# EAGLE board CT_schematic (EAGLE 7.6.0)

Size 100 x 80 mm. Coordinates in mm from the lower left corner, seen from the top.
Outline: 0,0 100,0 100,80 0,80 0,0
Copper layers (1*16): Top 0.035mm / dielectric 1.5mm / Bottom 0.035mm
Design rules "default": minimum track width 10mil, minimum drill 24mil, track to track 8mil, track to pad 8mil, pad to pad 8mil, via to via 8mil, smd to smd 8mil, copper to edge 40mil, drill to drill 8mil, minimum pad ring 10mil, minimum via ring 8mil, stop-mask expansion 4mil, vias tented up to drill 0mil, thermal gap 10mil

## Footprints (pad centres in the part's own frame; a part is rotated, then mirrored left to right if it is on the bottom)
C0603 = smd 0.8 x 0.8: 1 -0.762,0; 2 0.762,0
C0402 = smd 0.5 x 0.5: 1 -0.508,0; 2 0.508,0
C0805 = smd 1.2 x 1.3: 1 -1.016,0; 2 1.016,0
C1206 = smd 1.3 x 1.6: 1 -1.524,0; 2 1.524,0
C1210 = smd 1.2 x 2.5: 1 -1.524,0; 2 1.524,0
EXV-9H = smd 3.505 x 1.676: 1 -2.857,0; 2 2.857,0
L0603 = smd 0.8 x 0.8: 1 -0.762,0; 2 0.762,0
L1210 = smd 1.2 x 2.5: 1 -1.524,0; 2 1.524,0
PJ-037B_PACKAGE = drill 3.7 square: 1 12,0 | drill 3.2 square: 2 6,0
R0603 = smd 0.8 x 0.8: 1 -0.762,0; 2 0.762,0
LQFP100 = smd 0.3 x 1.2: 1 -6,-7.75; 2 -5.5,-7.75; 3 -5,-7.75; 4 -4.5,-7.75; 5 -4,-7.75; 6 -3.5,-7.75; 7 -3,-7.75; 8 -2.5,-7.75; 9 -2,-7.75; 10 -1.5,-7.75; 11 -1,-7.75; 12 -0.5,-7.75; 13 0,-7.75; 14 0.5,-7.75; 15 1,-7.75; 16 1.5,-7.75; 17 2,-7.75; 18 2.5,-7.75; 19 3,-7.75; 20 3.5,-7.75; 21 4,-7.75; 22 4.5,-7.75; 23 5,-7.75; 24 5.5,-7.75; 25 6,-7.75; 51 6,7.75; 52 5.5,7.75; 53 5,7.75; 54 4.5,7.75; 55 4,7.75; 56 3.5,7.75; 57 3,7.75; 58 2.5,7.75; 59 2,7.75; 60 1.5,7.75; 61 1,7.75; 62 0.5,7.75; 63 0,7.75; 64 -0.5,7.75; 65 -1,7.75; 66 -1.5,7.75; 67 -2,7.75; 68 -2.5,7.75; 69 -3,7.75; 70 -3.5,7.75; 71 -4,7.75; 72 -4.5,7.75; 73 -5,7.75; 74 -5.5,7.75; 75 -6,7.75 | smd 1.2 x 0.3: 26 7.75,-6; 27 7.75,-5.5; 28 7.75,-5; 29 7.75,-4.5; 30 7.75,-4; 31 7.75,-3.5; 32 7.75,-3; 33 7.75,-2.5; 34 7.75,-2; 35 7.75,-1.5; 36 7.75,-1; 37 7.75,-0.5; 38 7.75,0; 39 7.75,0.5; 40 7.75,1; 41 7.75,1.5; 42 7.75,2; 43 7.75,2.5; 44 7.75,3; 45 7.75,3.5; 46 7.75,4; 47 7.75,4.5; 48 7.75,5; 49 7.75,5.5; 50 7.75,6; 76 -7.75,6; 77 -7.75,5.5; 78 -7.75,5; 79 -7.75,4.5; 80 -7.75,4; 81 -7.75,3.5; 82 -7.75,3; 83 -7.75,2.5; 84 -7.75,2; 85 -7.75,1.5; 86 -7.75,1; 87 -7.75,0.5; 88 -7.75,0; 89 -7.75,-0.5; 90 -7.75,-1; 91 -7.75,-1.5; 92 -7.75,-2; 93 -7.75,-2.5; 94 -7.75,-3; 95 -7.75,-3.5; 96 -7.75,-4; 97 -7.75,-4.5; 98 -7.75,-5; 99 -7.75,-5.5; 100 -7.75,-6
HTQFP-64-EXP = smd 1.5 x 0.3: 1 -5.7,3.75; 2 -5.7,3.25; 3 -5.7,2.75; 4 -5.7,2.25; 5 -5.7,1.75; 6 -5.7,1.25; 7 -5.7,0.75; 8 -5.7,0.25; 9 -5.7,-0.25; 10 -5.7,-0.75; 11 -5.7,-1.25; 12 -5.7,-1.75; 13 -5.7,-2.25; 14 -5.7,-2.75; 15 -5.7,-3.25; 16 -5.7,-3.75; 33 5.7,-3.75; 34 5.7,-3.25; 35 5.7,-2.75; 36 5.7,-2.25; 37 5.7,-1.75; 38 5.7,-1.25; 39 5.7,-0.75; 40 5.7,-0.25; 41 5.7,0.25; 42 5.7,0.75; 43 5.7,1.25; 44 5.7,1.75; 45 5.7,2.25; 46 5.7,2.75; 47 5.7,3.25; 48 5.7,3.75 | smd 0.3 x 1.5: 17 -3.75,-5.7; 18 -3.25,-5.7; 19 -2.75,-5.7; 20 -2.25,-5.7; 21 -1.75,-5.7; 22 -1.25,-5.7; 23 -0.75,-5.7; 24 -0.25,-5.7; 25 0.25,-5.7; 26 0.75,-5.7; 27 1.25,-5.7; 28 1.75,-5.7; 29 2.25,-5.7; 30 2.75,-5.7; 31 3.25,-5.7; 32 3.75,-5.7; 49 3.75,5.7; 50 3.25,5.7; 51 2.75,5.7; 52 2.25,5.7; 53 1.75,5.7; 54 1.25,5.7; 55 0.75,5.7; 56 0.25,5.7; 57 -0.25,5.7; 58 -0.75,5.7; 59 -1.25,5.7; 60 -1.75,5.7; 61 -2.25,5.7; 62 -2.75,5.7; 63 -3.25,5.7; 64 -3.75,5.7 | smd 8 x 8: EXP 0,0 | drill 0.2 pad 0.3: P$9 3.25,3.25; P$10 1.95,3.25; P$11 0.65,3.25; P$12 -0.65,3.25; P$13 -1.95,3.25; P$14 -3.25,3.25; P$15 -3.25,1.95; P$16 -1.95,1.95; P$17 -0.65,1.95; P$18 0.65,1.95; P$19 1.95,1.95; P$20 3.25,1.95; P$24 3.25,0.65; P$25 3.25,-0.65; P$26 1.95,0.65; P$27 1.95,-0.65; P$28 0.65,0.65; P$29 0.65,-0.65; P$30 -0.65,0.65; P$31 -0.65,-0.65; P$32 -1.95,0.65; P$33 -1.95,-0.65; P$34 -3.25,0.65; P$35 -3.25,-0.65; P$36 -3.25,-1.95; P$37 -1.95,-1.95; P$38 -0.65,-1.95; P$39 0.65,-1.95; P$40 1.95,-1.95; P$41 3.25,-1.95; P$44 3.25,-3.25; P$45 1.95,-3.25; P$46 0.65,-3.25; P$47 -0.65,-3.25; P$48 -1.95,-3.25; P$49 -3.25,-3.25
7499511611A = drill 0.9: 1 -5.075,-15.24; 2 -3.045,-15.24; 3 -1.015,-15.24; 4 1.015,-15.24; 5 3.045,-15.24; 6 5.075,-15.24; 7 -6.09,-17.78; 8 -4.06,-17.78; 9 -2.03,-17.78; 10 2.03,-17.78; 11 4.06,-17.78; 12 6.09,-17.78; 13 -5.59,-8.12; 14 5.59,-8.12; 15 -5.59,-6.66; 16 5.59,-6.66 | drill 1.02: 17 -6.095,-20.32; 18 -3.555,-20.32; 19 3.555,-20.32; 20 6.095,-20.32 | drill 1.57: Z1 -8.065,3.18; Z2 8.065,3.18 | hole 3: -6.35,0; 6.35,0
SAMTEC_FTSH-105-01-L-DV-K = smd 0.762 x 2.794: 1 -2.54,-2.032; 2 -2.54,2.032; 3 -1.27,-2.032; 4 -1.27,2.032; 5 0,-2.032; 6 0,2.032; 7 1.27,-2.032; 8 1.27,2.032; 9 2.54,-2.032; 10 2.54,2.032
SSOP-20 = smd 1.651 x 0.432: 1 -3.48,2.925; 2 -3.48,2.275; 3 -3.48,1.625; 4 -3.48,0.975; 5 -3.48,0.325; 6 -3.48,-0.325; 7 -3.48,-0.975; 8 -3.48,-1.625; 9 -3.48,-2.275; 10 -3.48,-2.925; 11 3.48,-2.925; 12 3.48,-2.275; 13 3.48,-1.625; 14 3.48,-0.975; 15 3.48,-0.325; 16 3.48,0.325; 17 3.48,0.975; 18 3.48,1.625; 19 3.48,2.275; 20 3.48,2.925
HTSS-105-01-G-D = drill 1 pad 1.8 square: 1 0,0 | drill 1 pad 1.8: 2 0,2.54; 3 2.54,0; 4 2.54,2.54; 5 5.08,0; 6 5.08,2.54; 7 7.62,0; 8 7.62,2.54; 9 10.16,0; 10 10.16,2.54
MOLEX_47219-2001 = smd 0.8 x 1.5: 1 3.2,-2.1; 2 2.1,-2.1; 3 1,-2.1; 4 -0.1,-2.1; 5 -1.2,-2.1; 6 -2.3,-2.1; 7 -3.4,-2.1; 8 -4.5,-2.1 | smd 1.5 x 2.05: G1 6.875,-4.7; G2 6.875,3.6; G3 -6.875,3.6; G4 -6.875,-4.7
ABS07-32.768KHZ-7-T = smd 1.1 x 2.4: 1 -2.5,0; 2 0,0
ASFL1 = smd 1.7 x 1.5: 1 -1.27,-1.1; 2 1.27,-1.1; 3 1.27,1.1; 4 -1.27,1.1
IDT74FCT38072 = smd 0.51 x 1: 1 0,0; 2 1.27,0; 3 2.54,0; 4 3.81,0; 5 3.81,4.95; 6 2.54,4.95; 7 1.27,4.95; 8 0,4.95
WSON-8 = smd 0.3 x 0.6: 1 -0.75,0; 2 0.05,0; 3 0.85,0; 4 1.65,0; 5 1.65,3.8; 6 0.85,3.8; 7 0.05,3.8; 8 -0.75,3.8 | smd 3 x 2.6: PAD 0.45,1.9
SOIC-8_EP = smd 1.6 x 0.533: 1 -2.921,1.905; 2 -2.921,0.635; 3 -2.921,-0.635; 4 -2.921,-1.905; 5 2.921,-1.905; 6 2.921,-0.635; 7 2.921,0.635; 8 2.921,1.905 | smd 2.54 x 3.302: EPAD 0,0 | drill 0.406 pad 0.406: P$1 -0.508,0.635; P$2 0.381,0.635; P$3 -0.508,-0.635; P$4 0.381,-0.635
SON-6 = smd 0.55 x 0.3: 1 -0.355,0.5 | smd 0.52 x 0.3: 2 -0.37,0; 3 -0.37,-0.5; 4 0.37,-0.5; 5 0.37,0; 6 0.37,0.5
SW_4-1437565-2 = smd 1.4 x 2.1: 1 -2.23,4.55; 2 -2.23,-4.55; 3 2.23,4.55; 4 2.23,-4.55
LGM67K-G1J2-24-Z = smd 0.8 x 1.4: A -2,0; C 0,0
NC7SZ125M5X = smd 1.3 x 0.7: 1 -1.3,0.95; 2 -1.3,0; 3 -1.3,-0.95; 4 1.3,-0.95; 5 1.3,0.95

## Placement (x,y rotation side)
C1  1e-06  [C0603]  -86.36,92.71 0 top  (outside the outline)
C2  1e-07  [C0603]  -90.17,92.71 0 top  (outside the outline)
C3  1e-07  [C0603]  -93.98,92.71 0 top  (outside the outline)
C4  1e-07  [C0603]  -15.24,97.79 0 top  (outside the outline)
C5  1e-07  [C0603]  -19.05,97.79 0 top  (outside the outline)
C6  1e-07  [C0603]  -22.86,97.79 0 top  (outside the outline)
C7  1e-07  [C0603]  -26.67,97.79 0 top  (outside the outline)
C8  4.7e-06  [C0603]  -74.93,92.71 0 top  (outside the outline)
C9  2.2e-06  [C0603]  -78.74,92.71 0 top  (outside the outline)
C10  2.2e-06  [C0603]  -82.55,92.71 0 top  (outside the outline)
C11  1e-08  [C0603]  -30.48,97.79 0 top  (outside the outline)
C12  1e-06  [C0603]  -34.29,97.79 0 top  (outside the outline)
C13  1e-11  [C0402]  -76.2,102.87 0 top  (outside the outline)
C14  1e-11  [C0402]  -80.01,102.87 0 top  (outside the outline)
C15  1e-07  [C0402]  -83.82,102.87 0 top  (outside the outline)
C16  1e-06  [C0603]  -38.1,97.79 0 top  (outside the outline)
C17  1e-07  [C0402]  -87.63,102.87 0 top  (outside the outline)
C18  1e-06  [C0603]  -41.91,97.79 0 top  (outside the outline)
C19  1e-07  [C0402]  -91.44,102.87 0 top  (outside the outline)
C20  1e-06  [C0603]  -45.72,97.79 0 top  (outside the outline)
C21  1e-07  [C0402]  -15.24,107.95 0 top  (outside the outline)
C22  1e-05  [C0805]  -34.29,81.28 0 top  (outside the outline)
C23  1e-08  [C0402]  -19.05,107.95 0 top  (outside the outline)
C24  1e-06  [C0603]  -49.53,97.79 0 top  (outside the outline)
C25  1e-07  [C0402]  -22.86,107.95 0 top  (outside the outline)
C26  1e-06  [C0603]  -53.34,97.79 0 top  (outside the outline)
C27  1e-07  [C0402]  -26.67,107.95 0 top  (outside the outline)
C28  1e-05  [C0805]  -39.37,81.28 0 top  (outside the outline)
C29  1e-08  [C0402]  -30.48,107.95 0 top  (outside the outline)
C30  1e-06  [C0603]  -57.15,97.79 0 top  (outside the outline)
C31  1e-07  [C0402]  -34.29,107.95 0 top  (outside the outline)
C32  1e-06  [C0603]  -60.96,97.79 0 top  (outside the outline)
C33  1e-07  [C0402]  -38.1,107.95 0 top  (outside the outline)
C34  1e-06  [C0603]  -64.77,97.79 0 top  (outside the outline)
C35  1e-07  [C0402]  -41.91,107.95 0 top  (outside the outline)
C36  1e-06  [C0603]  -68.58,97.79 0 top  (outside the outline)
C37  1e-07  [C0402]  -45.72,107.95 0 top  (outside the outline)
C38  1e-05  [C0805]  -44.45,81.28 0 top  (outside the outline)
C39  1e-08  [C0402]  -49.53,107.95 0 top  (outside the outline)
C40  1e-06  [C0603]  -72.39,97.79 0 top  (outside the outline)
C41  1e-07  [C0402]  -53.34,107.95 0 top  (outside the outline)
C42  1e-06  [C0603]  -76.2,97.79 0 top  (outside the outline)
C43  1e-07  [C0402]  -57.15,107.95 0 top  (outside the outline)
C44  1e-05  [C0805]  -49.53,81.28 0 top  (outside the outline)
C45  1e-08  [C0402]  -60.96,107.95 0 top  (outside the outline)
C46  1e-07  [C0402]  -64.77,107.95 0 top  (outside the outline)
C47  1e-06  [C0603]  -80.01,97.79 0 top  (outside the outline)
C48  1e-06  [C0603]  -83.82,97.79 0 top  (outside the outline)
C49  1e-06  [C0603]  -87.63,97.79 0 top  (outside the outline)
C50  4.7e-06  [C0805]  -54.61,81.28 0 top  (outside the outline)
C51  1e-07  [C0402]  -68.58,107.95 0 top  (outside the outline)
C52  1e-05  [C0805]  -59.69,81.28 0 top  (outside the outline)
C53  1e-08  [C0402]  -72.39,107.95 0 top  (outside the outline)
C54  1e-08  [C0402]  -76.2,107.95 0 top  (outside the outline)
C55  1e-08  [C0402]  -80.01,107.95 0 top  (outside the outline)
C56  1e-05  [C1206]  -76.2,74.93 0 top  (outside the outline)
C57  1e-05  [C0805]  -64.77,81.28 0 top  (outside the outline)
C58  1e-08  [C0402]  -83.82,107.95 0 top  (outside the outline)
C59  1e-05  [C1206]  -82.55,74.93 0 top  (outside the outline)
C60  1e-05  [C0805]  -69.85,81.28 0 top  (outside the outline)
C61  1e-08  [C0402]  -87.63,107.95 0 top  (outside the outline)
C62  1e-05  [C1206]  -88.9,74.93 0 top  (outside the outline)
C63  1e-05  [C1210]  -38.1,74.93 0 top  (outside the outline)
C64  1e-05  [C1210]  -44.45,74.93 0 top  (outside the outline)
C65  1e-05  [C1210]  -50.8,74.93 0 top  (outside the outline)
C66  1e-05  [C1210]  -57.15,74.93 0 top  (outside the outline)
C67  1e-05  [C1210]  -63.5,74.93 0 top  (outside the outline)
C68  1e-07  [C0402]  -91.44,107.95 0 top  (outside the outline)
C69  0.0001  [EXV-9H]  -53.34,66.04 0 top  (outside the outline)
C70  0.0001  [EXV-9H]  -64.77,66.04 0 top  (outside the outline)
C71  1e-08  [C0402]  -15.24,113.03 0 top  (outside the outline)
C72  1e-08  [C0402]  -19.05,113.03 0 top  (outside the outline)
C73  1e-08  [C0402]  -22.86,113.03 0 top  (outside the outline)
F1  240.0  [L0603]  -91.44,97.79 0 top  (outside the outline)
I1  1.5e-05  [L1210]  -69.85,74.93 0 top  (outside the outline)
J1  PJ-037B  [PJ-037B_PACKAGE]  -57.15,45.72 0 top  (outside the outline)
R2  1000.0  [R0603]  -15.24,102.87 0 top  (outside the outline)
R4  4700.0  [R0603]  -19.05,102.87 0 top  (outside the outline)
R5  4700.0  [R0603]  -22.86,102.87 0 top  (outside the outline)
R6  2200.0  [R0603]  -26.67,102.87 0 top  (outside the outline)
R7  2200.0  [R0603]  -30.48,102.87 0 top  (outside the outline)
R8  10000.0  [R0603]  -71.12,87.63 0 top  (outside the outline)
R9  200.0  [R0603]  -34.29,102.87 0 top  (outside the outline)
R10  200.0  [R0603]  -38.1,102.87 0 top  (outside the outline)
R11  10000.0  [R0603]  -76.2,87.63 0 top  (outside the outline)
R12  11000.0  [R0603]  -81.28,87.63 0 top  (outside the outline)
R13  10000.0  [R0603]  -86.36,87.63 0 top  (outside the outline)
R14  10000.0  [R0603]  -91.44,87.63 0 top  (outside the outline)
R15  10000.0  [R0603]  -15.24,92.71 0 top  (outside the outline)
R16  10000.0  [R0603]  -20.32,92.71 0 top  (outside the outline)
R17  10000.0  [R0603]  -25.4,92.71 0 top  (outside the outline)
R18  10000.0  [R0603]  -30.48,92.71 0 top  (outside the outline)
R19  10000.0  [R0603]  -35.56,92.71 0 top  (outside the outline)
R20  2490.0  [R0603]  -41.91,102.87 0 top  (outside the outline)
R21  10000.0  [R0603]  -40.64,92.71 0 top  (outside the outline)
R22  10000.0  [R0603]  -45.72,92.71 0 top  (outside the outline)
R23  10000.0  [R0603]  -50.8,92.71 0 top  (outside the outline)
R24  10000.0  [R0603]  -55.88,92.71 0 top  (outside the outline)
R25  5.0  [R0603]  -45.72,102.87 0 top  (outside the outline)
R26  100000.0  [R0603]  -83.82,81.28 0 top  (outside the outline)
R27  100000.0  [R0603]  -88.9,81.28 0 top  (outside the outline)
R28  100000.0  [R0603]  -93.98,81.28 0 top  (outside the outline)
R29  100000.0  [R0603]  -15.24,87.63 0 top  (outside the outline)
R30  100000.0  [R0603]  -20.32,87.63 0 top  (outside the outline)
R31  100000.0  [R0603]  -25.4,87.63 0 top  (outside the outline)
R32  100000.0  [R0603]  -30.48,87.63 0 top  (outside the outline)
R33  100000.0  [R0603]  -35.56,87.63 0 top  (outside the outline)
R34  100000.0  [R0603]  -40.64,87.63 0 top  (outside the outline)
R35  100000.0  [R0603]  -45.72,87.63 0 top  (outside the outline)
R36  100.0  [R0603]  -49.53,102.87 0 top  (outside the outline)
R37  1000.0  [R0603]  -53.34,102.87 0 top  (outside the outline)
R38  100000.0  [R0603]  -50.8,87.63 0 top  (outside the outline)
R39  806.0  [R0603]  -57.15,102.87 0 top  (outside the outline)
R40  1000.0  [R0603]  -60.96,102.87 0 top  (outside the outline)
R41  100000.0  [R0603]  -55.88,87.63 0 top  (outside the outline)
R42  1500.0  [R0603]  -64.77,102.87 0 top  (outside the outline)
R43  1000.0  [R0603]  -68.58,102.87 0 top  (outside the outline)
R44  4031.5447154472  [R0603]  -78.74,81.28 0 top  (outside the outline)
R45  2200.0  [R0603]  -72.39,102.87 0 top  (outside the outline)
R46  10000.0  [R0603]  -60.96,92.71 0 top  (outside the outline)
R47  10000.0  [R0603]  -66.04,92.71 0 top  (outside the outline)
R48  82000.0  [R0603]  -71.12,92.71 0 top  (outside the outline)
R49  300000.0  [R0603]  -60.96,87.63 0 top  (outside the outline)
R50  120000.0  [R0603]  -66.04,87.63 0 top  (outside the outline)
U1  STM32F207VET6  [LQFP100]  -43.18,8.89 0 top  (outside the outline)
U2  DP83867IRPAPT  [HTQFP-64-EXP]  -60.96,8.89 0 top  (outside the outline)
U3  7499511611A  [7499511611A]  -22.86,25.4 0 top  (outside the outline)
U4  FTSH-105-01-L-DV-K  [SAMTEC_FTSH-105-01-L-DV-K]  -35.56,45.72 0 top  (outside the outline)
U5  MAX3218EAP+T  [SSOP-20]  -17.78,57.15 0 top  (outside the outline)
U6  HTSS-105-01-G-D  [HTSS-105-01-G-D]  -92.71,41.91 0 top  (outside the outline)
U7  0472192001  [MOLEX_47219-2001]  -77.47,8.89 0 top  (outside the outline)
U8  ABS07-32.768KHZ-7-T  [ABS07-32.768KHZ-7-T]  -86.36,66.04 0 top  (outside the outline)
U9  ASFL1-25MHZ-NCS  [ASFL1]  -26.67,67.31 0 top  (outside the outline)
U10  idt74fct38072  [IDT74FCT38072]  -46.99,63.5 0 top  (outside the outline)
U11  LP3878SDX-ADJ/NOPB  [WSON-8]  -40.64,55.88 0 top  (outside the outline)
U12  LP3878SDX-ADJ/NOPB  [WSON-8]  -60.96,55.88 0 top  (outside the outline)
U13  LP3878SDX-ADJ/NOPB  [WSON-8]  -81.28,55.88 0 top  (outside the outline)
U14  MIC5234YME  [SOIC-8_EP]  -17.78,74.93 0 top  (outside the outline)
U15  TPS3895ADRYR  [SON-6]  -25.4,111.76 0 top  (outside the outline)
U16  4-1437565-2  [SW_4-1437565-2]  -73.66,44.45 0 top  (outside the outline)
U17  Q65110A2395  [LGM67K-G1J2-24-Z]  -26.67,74.93 0 top  (outside the outline)
U18  nc7sz125m5x  [NC7SZ125M5X]  -15.24,81.28 0 top  (outside the outline)
U19  nc7sz125m5x  [NC7SZ125M5X]  -21.59,81.28 0 top  (outside the outline)
U20  nc7sz125m5x  [NC7SZ125M5X]  -27.94,81.28 0 top  (outside the outline)

## Library data of the parts
C1-C73 F1 I1 J1 R2 R4-R50 U1-U20 = circuit_tree

## Nets
CLK_CRYSTAL_U1_8: C13.1 U1.8 U8.1
CLK_CRYSTAL_U1_9: C14.1 U1.9 U8.2
CLK_U1_12: U1.12 U10.7
CLK_U2_19: U2.19 U10.6
CLK_U10_3: U9.3 U10.3
GND: C1.2 C2.2 C3.2 C4.2 C5.2 C6.2 C7.2 C8.2 C9.2 C10.2 C11.2 C12.2 C13.2 C14.2 C15.2 C16.2 C17.2 C18.2 C19.2 C20.2 C21.2 C22.2 C23.2 C24.2 C25.2 C26.2 C27.2 C28.2 C29.2 C30.2 C31.2 C32.2 C33.2 C34.2 C35.2 C36.2 C37.2 C38.2 C39.2 C40.2 C41.2 C42.2 C43.2 C44.2 C45.2 C46.2 C47.2 C48.2 C49.2 C51.2 C52.2 C53.2 C54.2 C55.2 C56.2 C57.2 C58.2 C59.2 C60.2 C61.2 C62.2 C63.2 C64.2 C65.2 C66.2 C67.2 C68.2 C69.2 C70.2 C71.2 C72.2 C73.2 J1.2 R2.2 R8.2 R12.2 R13.2 R14.2 R15.2 R16.2 R17.2 R18.2 R19.2 R24.2 R25.2 R37.2 R40.2 R43.2 R45.2 R48.2 R50.2 U1.10 U1.20 U1.27 U1.74 U2.EXP U3.17 U3.20 U3.Z1 U3.Z2 U4.3 U4.5 U5.5 U5.17 U5.20 U6.9 U7.6 U7.G1 U7.G2 U7.G3 U7.G4 U9.2 U10.4 U10.5 U10.8 U11.3 U11.PAD U12.3 U12.PAD U13.3 U13.PAD U14.7 U14.EPAD U15.2 U17.C U18.2 U18.3 U19.1 U19.3 U20.1 U20.3
NET_U1_14: R5.1 U1.14 U20.4
NET_U1_16: R6.1 U1.16 U2.20
NET_U1_22: C11.1 C12.1 F1.1 U1.21 U1.22
NET_U1_25: R7.1 U1.25 U2.21
NET_U1_49: C9.1 U1.49
NET_U1_73: C10.1 U1.73
NET_U1_94: R8.1 U1.94
NET_U1_97: U17.A
NET_U1_98: U16.3 U16.4
NET_U2_15: R12.1 U2.15
NET_U2_24: R18.1 U2.24
NET_U2_25: R19.1 U2.25
NET_U2_31: R14.1 U2.31
NET_U2_32: R15.1 U2.32
NET_U2_33: R16.1 U2.33
NET_U2_34: R17.1 U2.34
NET_U2_40: R13.1 U2.40
NET_U2_59: R4.1 U2.59 U19.4
NET_U2_60: R11.1 U2.60
NET_U3_1: U3.1
NET_U3_2: U2.11 U3.2
NET_U3_3: U2.10 U3.3
NET_U3_4: U2.5 U3.4
NET_U3_5: U2.6 U3.5
NET_U3_6: C15.1 U3.1 U3.6 U3.7 U3.12
NET_U3_7: U3.7
NET_U3_8: U2.13 U3.8
NET_U3_9: U2.14 U3.9
NET_U3_10: U2.3 U3.10
NET_U3_11: U2.2 U3.11
NET_U3_18: R9.1 U3.18
NET_U3_19: R10.1 U3.19
NET_U3_61: R10.2
NET_U3_63: R9.2
NET_U4_9: R25.1 U4.9
NET_U5_1: I1.1 U5.1
NET_U5_2: R26.1 U5.2
NET_U5_3: R27.1 U5.3
NET_U5_4: R28.1 U5.4
NET_U5_15: C49.1 U5.15
NET_U5_16: C50.2 U5.16
NET_U5_18: C50.1 U5.18
NET_U5_19: C48.1 U5.19
NET_U6_3: U5.12 U6.3
NET_U6_4: U5.11 U6.4
NET_U6_5: U5.14 U6.5
NET_U6_6: U5.13 U6.6
NET_U11_1: C55.1 U11.1
NET_U11_6: R36.2 R37.1 U11.6
NET_U11_8: R35.1 U11.8
NET_U12_1: C58.1 U12.1
NET_U12_6: R39.2 R40.1 U12.6
NET_U12_8: R38.1 U12.8
NET_U13_1: C61.1 U13.1
NET_U13_6: R42.2 R43.1 U13.6
NET_U13_8: R41.1 U13.8
NET_U14_4: R44.2 R45.1 U14.4
NET_U15_1: R47.1 R48.1 U15.1
NET_U15_3: R49.2 R50.1 U15.3
NET_U15_4: R46.1 U15.4 U18.4 U19.2 U20.2
NET_U16_1: R2.1 U16.1 U16.2
PROC_ETH_COL: U1.26 U2.55
PROC_ETH_CRS: U1.23 U2.56
PROC_ETH_RX_CLK: U1.24 U2.43
PROC_ETH_RX_DV: U1.32 U2.53
PROC_ETH_RX_ER: U1.47 U2.54
PROC_ETH_RXD0: R20.1 U1.33 U2.44
PROC_ETH_RXD1: U1.34 U2.45
PROC_ETH_RXD2: U1.35 U2.46
PROC_ETH_RXD3: U1.36 U2.47
PROC_ETH_TX_CLK: U1.18 U2.30
PROC_ETH_TX_EN: U1.48 U2.52
PROC_ETH_TXD0: U1.51 U2.38
PROC_ETH_TXD1: U1.52 U2.37
PROC_ETH_TXD2: U1.17 U2.36
PROC_ETH_TXD3: U1.1 U2.35
PROC_SDIO_CK: R30.1 U1.80 U7.5
PROC_SDIO_CMD: R29.1 U1.83 U7.3
PROC_SDIO_D0: R31.1 U1.65 U7.7
PROC_SDIO_D1: R32.1 U1.66 U7.8
PROC_SDIO_D2: R33.1 U1.78 U7.1
PROC_SDIO_D3: R34.1 U1.79 U7.2
PROC_SYS_JTDI: R22.1 U1.77 U4.8
PROC_SYS_JTDO_SWO: U1.89 U4.6
PROC_SYS_JTMS_SWDIO: R23.1 U1.72 U4.2
PROC_SYS_TRACECLK: R24.1 U1.76 U4.4
PROC_USART1_CTS: U1.70 U5.8
PROC_USART1_RTS: U1.71 U5.10
PROC_USART1_RX: U1.69 U5.9
PROC_USART1_TX: U1.68 U5.7
RST_OUT_U4_JTAG_RST_B: R21.1 U4.10 U18.1
VCC_S1_8V6: C56.1 C59.1 C62.1 C64.1 C65.1 C69.1 C70.1 J1.1 R35.2 R38.2 R41.2 U11.4 U12.4 U13.4 U14.5 U14.8
VCC_TIER1_1V1: C30.1 C31.1 C32.1 C33.1 C34.1 C35.1 C36.1 C37.1 C38.1 C39.1 C57.1 R36.1 U2.8 U2.29 U2.42 U2.58 U11.5
VCC_TIER1_1V8: C1.1 C2.1 C3.1 C4.1 C5.1 C6.1 C7.1 C8.1 C16.1 C17.1 C18.1 C19.1 C20.1 C21.1 C22.1 C23.1 C40.1 C41.1 C42.1 C43.1 C44.1 C45.1 C46.1 C47.1 C51.1 C52.1 C60.1 C68.1 C71.1 C72.1 C73.1 F1.2 I1.2 R4.2 R5.2 R6.2 R7.2 R11.2 R20.2 R21.2 R22.2 R23.2 R26.2 R27.2 R28.2 R29.2 R30.2 R31.2 R32.2 R33.2 R34.2 R39.1 R46.2 R47.2 R49.1 U1.6 U1.11 U1.19 U1.28 U1.50 U1.75 U1.100 U2.17 U2.23 U2.41 U2.57 U2.64 U4.1 U5.6 U7.4 U12.5 U15.6 U18.5 U19.5 U20.5
VCC_TIER1_2V5: C24.1 C25.1 C26.1 C27.1 C28.1 C29.1 C63.1 R42.1 U2.4 U2.12 U13.5
VCC_TIER1_3V3: C53.1 C54.1 C66.1 C67.1 R44.1 U9.4 U10.1 U10.2 U14.1

## Tracks (layer width: path | path; a pad name or v marks a point on that pad's centre or on a via)
CLK_CRYSTAL_U1_8  (2 unrouted)
CLK_CRYSTAL_U1_9  (2 unrouted)
CLK_U1_12  (1 unrouted)
CLK_U2_19  (1 unrouted)
CLK_U10_3  (1 unrouted)
GND  (130 unrouted)
NET_U1_14  (2 unrouted)
NET_U1_16  (2 unrouted)
NET_U1_22  (4 unrouted)
NET_U1_25  (2 unrouted)
NET_U1_49  (1 unrouted)
NET_U1_73  (1 unrouted)
NET_U1_94  (1 unrouted)
NET_U1_98  (1 unrouted)
NET_U2_15  (1 unrouted)
NET_U2_24  (1 unrouted)
NET_U2_25  (1 unrouted)
NET_U2_31  (1 unrouted)
NET_U2_32  (1 unrouted)
NET_U2_33  (1 unrouted)
NET_U2_34  (1 unrouted)
NET_U2_40  (1 unrouted)
NET_U2_59  (2 unrouted)
NET_U2_60  (1 unrouted)
NET_U3_2  (1 unrouted)
NET_U3_3  (1 unrouted)
NET_U3_4  (1 unrouted)
NET_U3_5  (1 unrouted)
NET_U3_6  (4 unrouted)
NET_U3_8  (1 unrouted)
NET_U3_9  (1 unrouted)
NET_U3_10  (1 unrouted)
NET_U3_11  (1 unrouted)
NET_U3_18  (1 unrouted)
NET_U3_19  (1 unrouted)
NET_U4_9  (1 unrouted)
NET_U5_1  (1 unrouted)
NET_U5_2  (1 unrouted)
NET_U5_3  (1 unrouted)
NET_U5_4  (1 unrouted)
NET_U5_15  (1 unrouted)
NET_U5_16  (1 unrouted)
NET_U5_18  (1 unrouted)
NET_U5_19  (1 unrouted)
NET_U6_3  (1 unrouted)
NET_U6_4  (1 unrouted)
NET_U6_5  (1 unrouted)
NET_U6_6  (1 unrouted)
NET_U11_1  (1 unrouted)
NET_U11_6  (2 unrouted)
NET_U11_8  (1 unrouted)
NET_U12_1  (1 unrouted)
NET_U12_6  (2 unrouted)
NET_U12_8  (1 unrouted)
NET_U13_1  (1 unrouted)
NET_U13_6  (2 unrouted)
NET_U13_8  (1 unrouted)
NET_U14_4  (2 unrouted)
NET_U15_1  (2 unrouted)
NET_U15_3  (2 unrouted)
NET_U15_4  (4 unrouted)
NET_U16_1  (2 unrouted)
PROC_ETH_COL  (1 unrouted)
PROC_ETH_CRS  (1 unrouted)
PROC_ETH_RX_CLK  (1 unrouted)
PROC_ETH_RX_DV  (1 unrouted)
PROC_ETH_RX_ER  (1 unrouted)
PROC_ETH_RXD0  (2 unrouted)
PROC_ETH_RXD1  (1 unrouted)
PROC_ETH_RXD2  (1 unrouted)
PROC_ETH_RXD3  (1 unrouted)
PROC_ETH_TX_CLK  (1 unrouted)
PROC_ETH_TX_EN  (1 unrouted)
PROC_ETH_TXD0  (1 unrouted)
PROC_ETH_TXD1  (1 unrouted)
PROC_ETH_TXD2  (1 unrouted)
PROC_ETH_TXD3  (1 unrouted)
PROC_SDIO_CK  (2 unrouted)
PROC_SDIO_CMD  (2 unrouted)
PROC_SDIO_D0  (2 unrouted)
PROC_SDIO_D1  (2 unrouted)
PROC_SDIO_D2  (2 unrouted)
PROC_SDIO_D3  (2 unrouted)
PROC_SYS_JTDI  (2 unrouted)
PROC_SYS_JTDO_SWO  (1 unrouted)
PROC_SYS_JTMS_SWDIO  (2 unrouted)
PROC_SYS_TRACECLK  (2 unrouted)
PROC_USART1_CTS  (1 unrouted)
PROC_USART1_RTS  (1 unrouted)
PROC_USART1_RX  (1 unrouted)
PROC_USART1_TX  (1 unrouted)
RST_OUT_U4_JTAG_RST_B  (2 unrouted)
VCC_S1_8V6  (15 unrouted)
VCC_TIER1_1V1  (16 unrouted)
VCC_TIER1_1V8  (74 unrouted)
VCC_TIER1_2V5  (10 unrouted)
VCC_TIER1_3V3  (8 unrouted)